# Altium PCB Carrier_I_PCB.PcbDoc
Units mm, origin at the board's own origin, x right, y up, seen from the top; angles counter-clockwise.
Board outline 100 x 80 mm, 2 copper layers (Top Layer, Bottom Layer); 8 components, 112 nets, 224 pads, 112 vias.
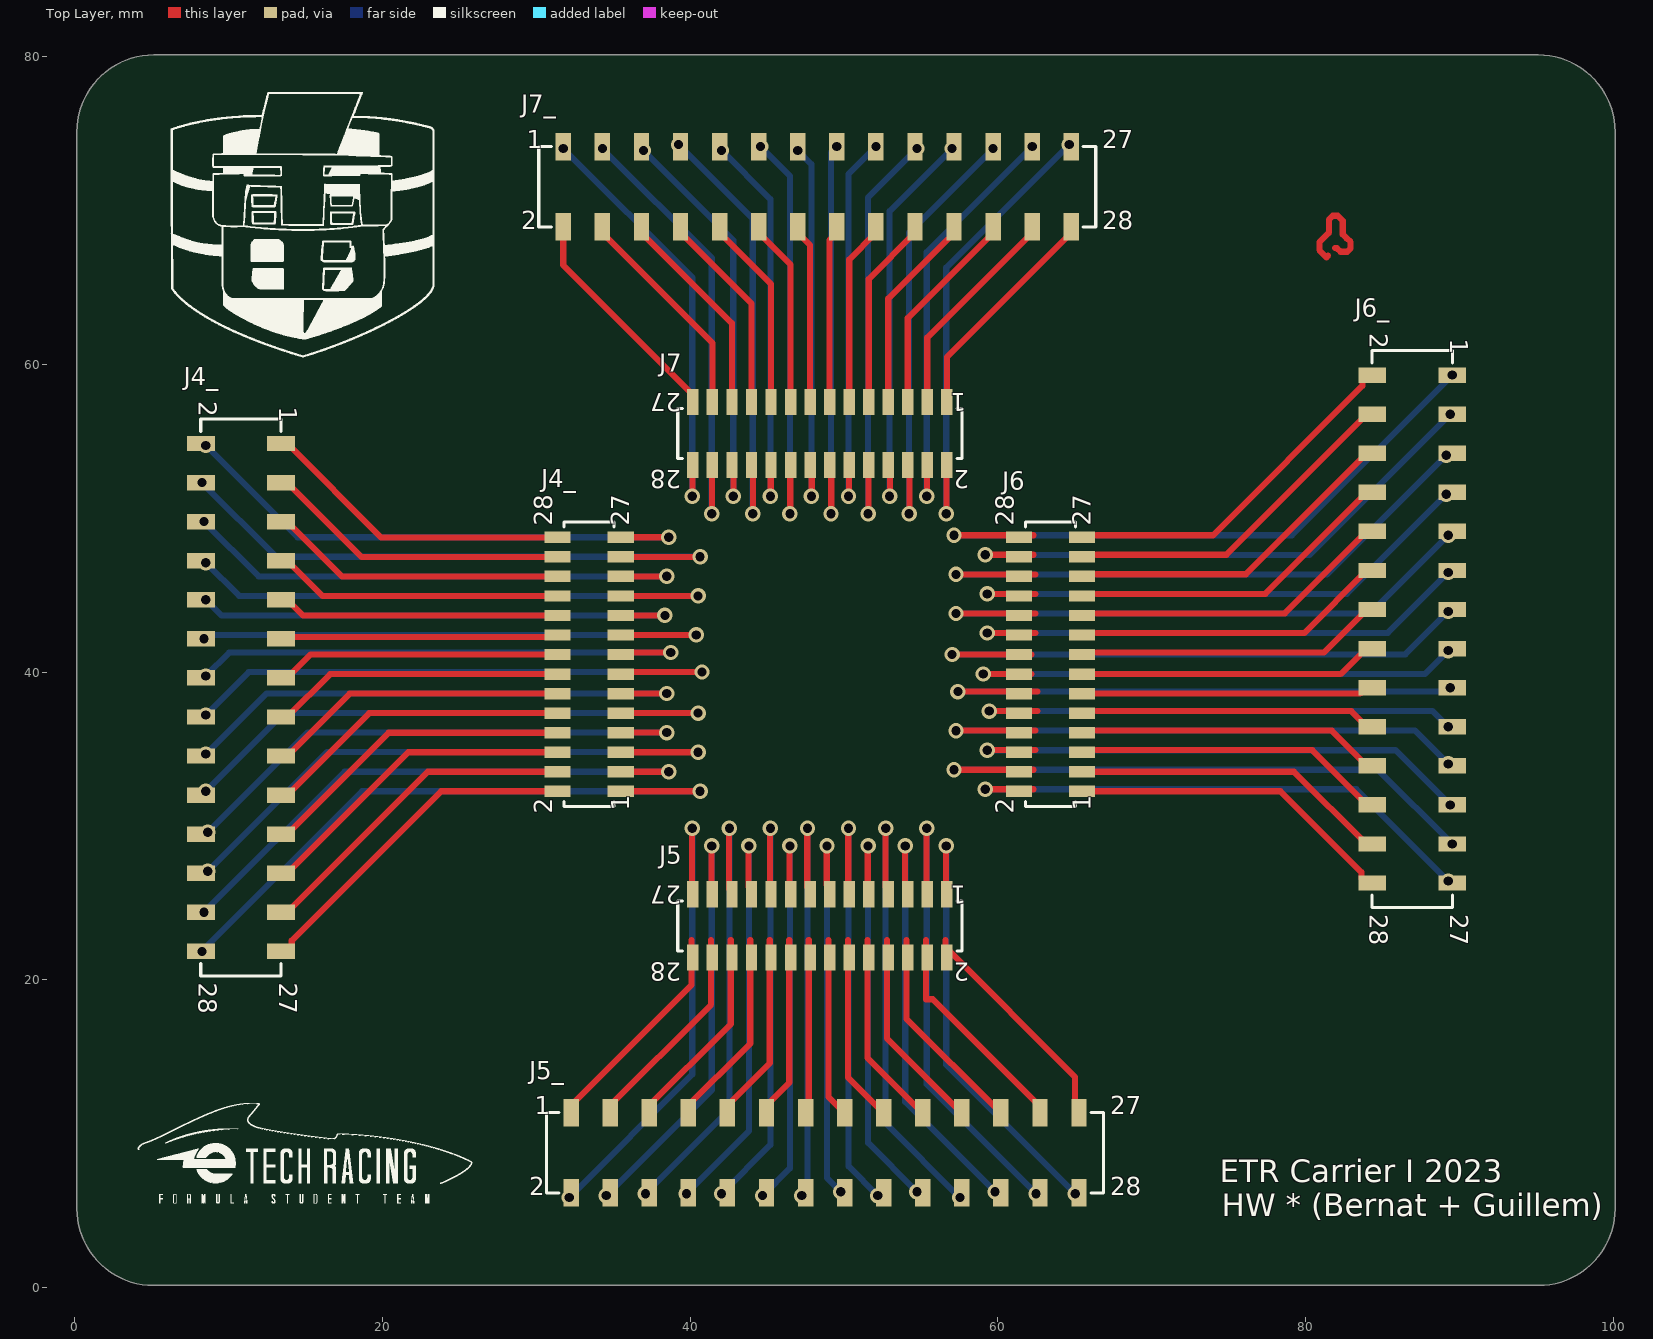
[diagram p0: Top Layer view]
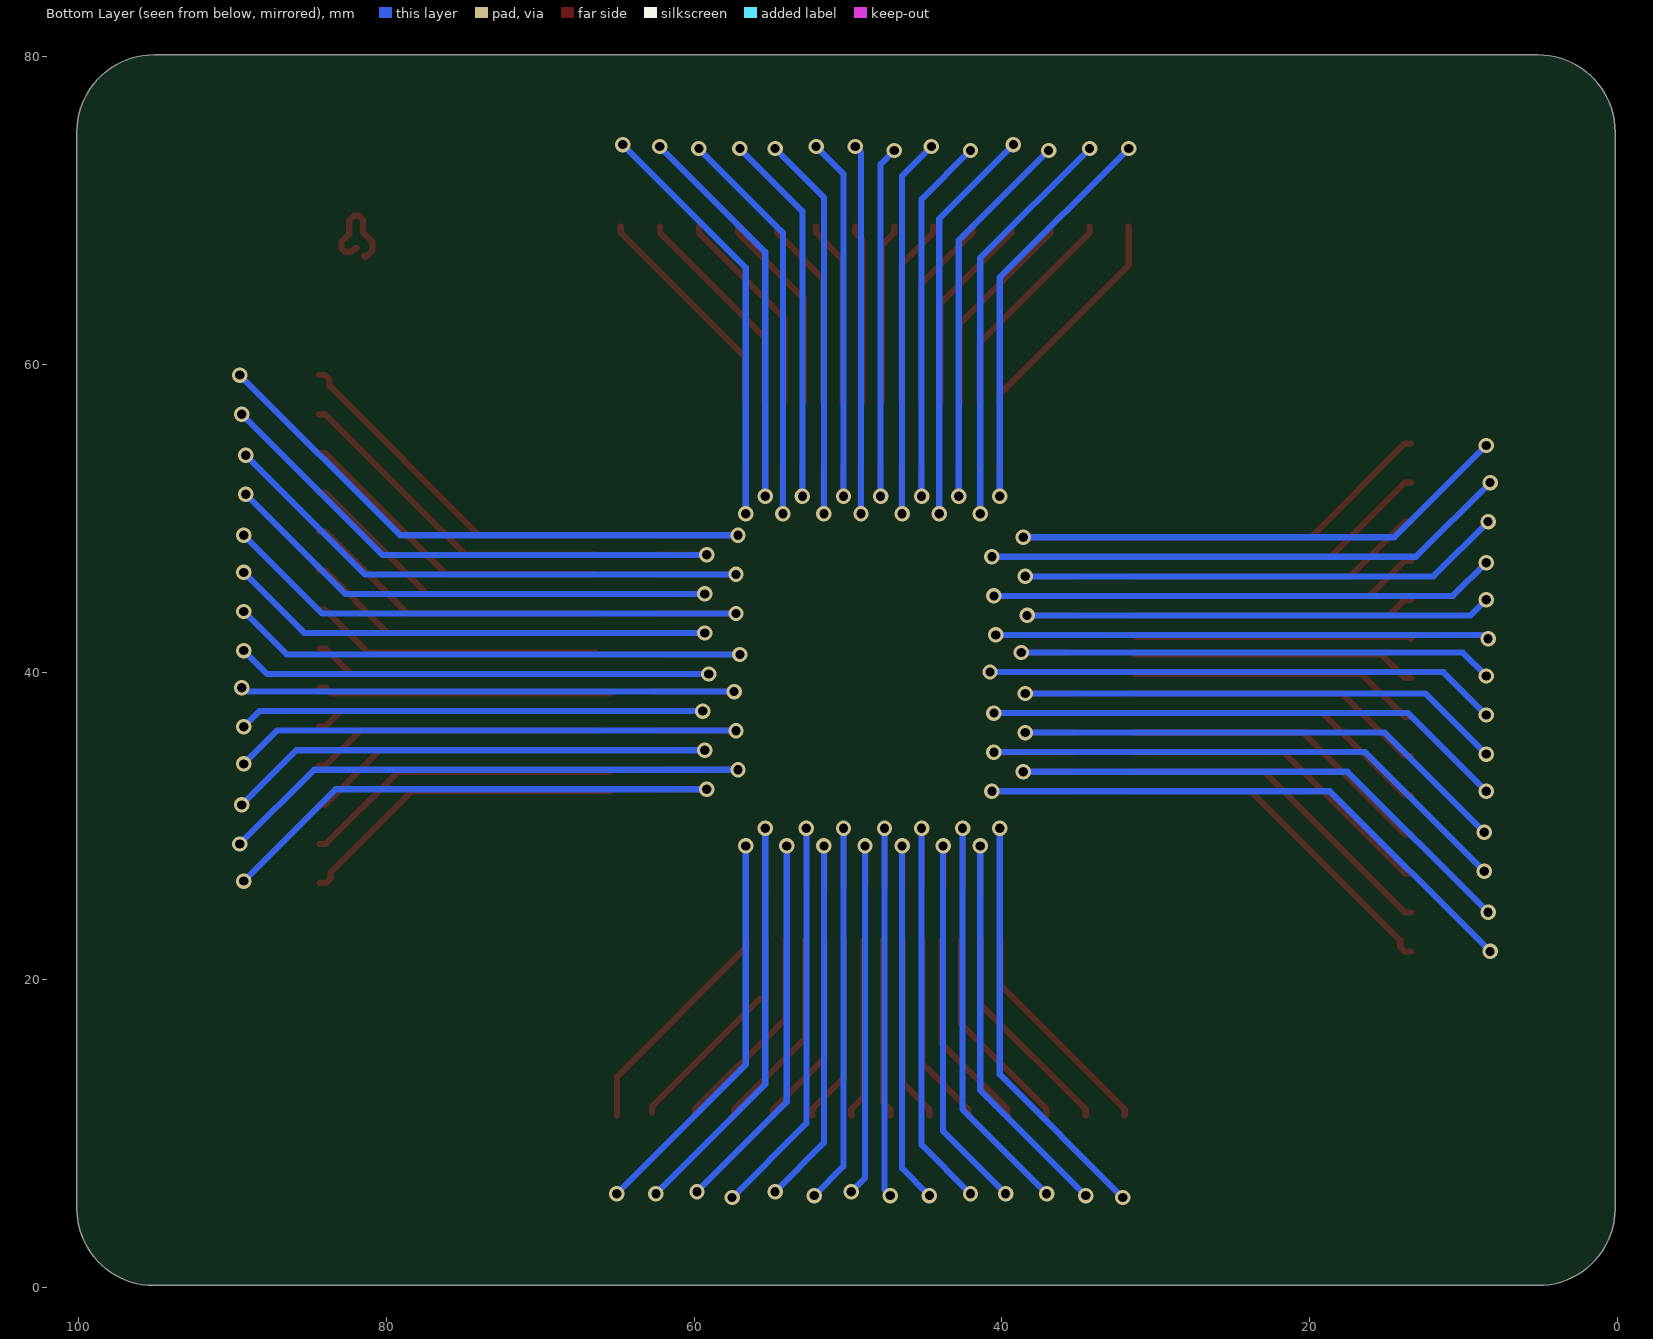
[diagram p1: Bottom Layer view, seen from below]
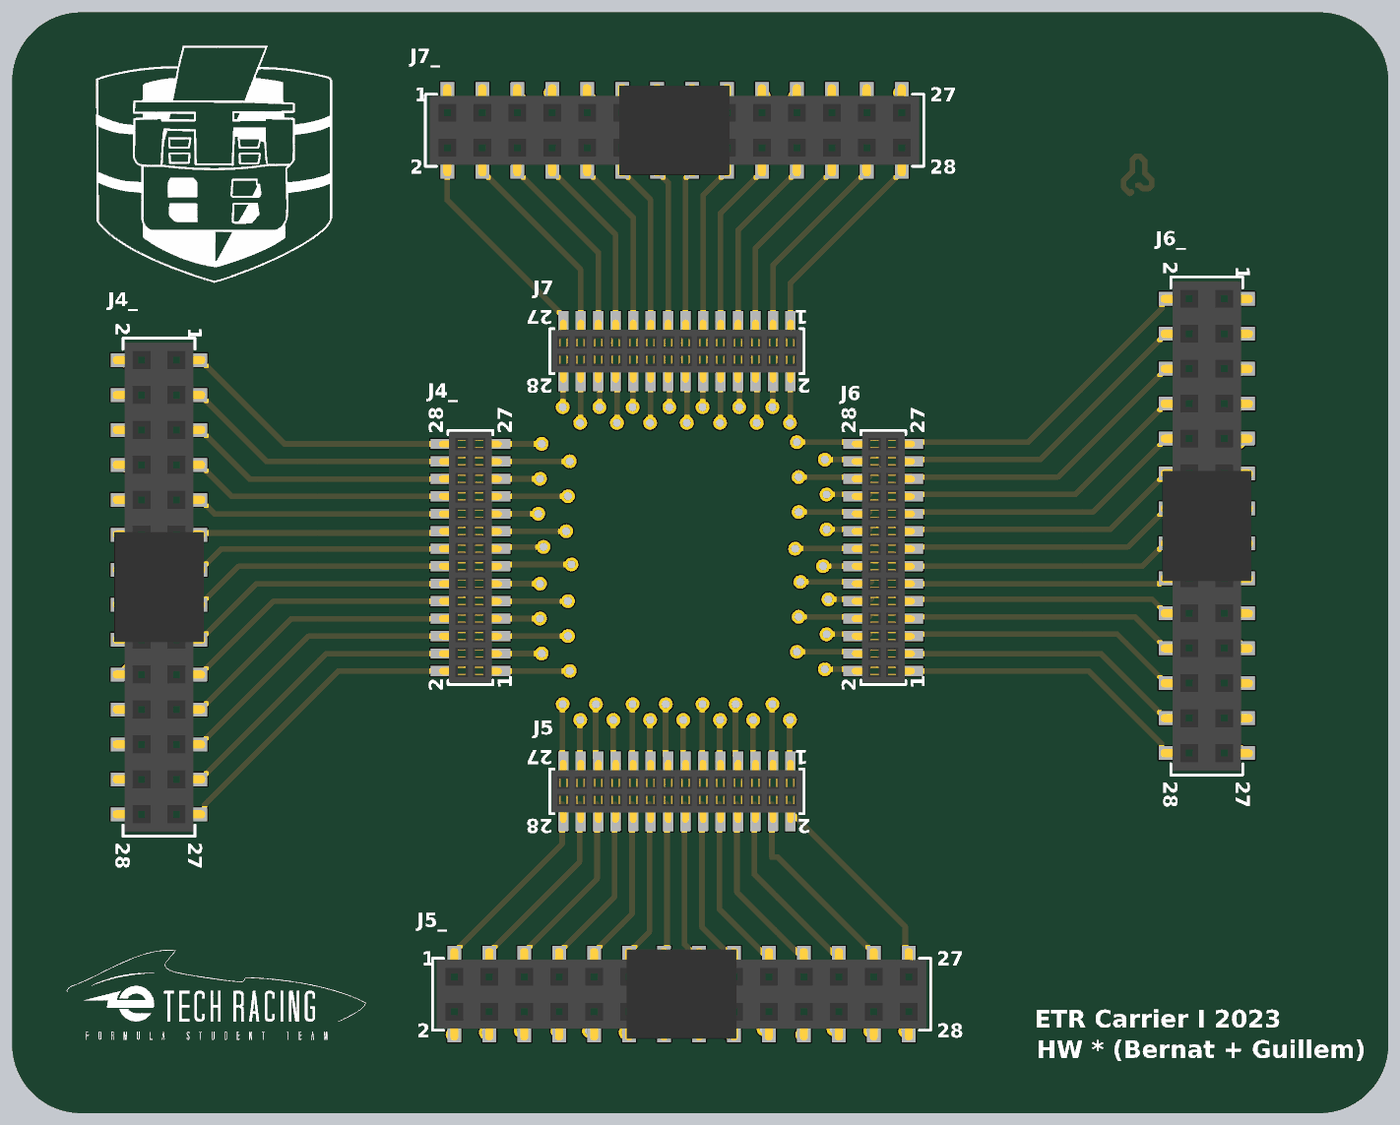
[diagram p2: 3D render of the assembled board from above, using the file's embedded part models]

## Layer stack, top to bottom
Top Solder: solder mask 0.0102, Solder Resist, Dk 3.5
Top Layer: signal copper 0.0356
Dielectric 1: dielectric 0.32, FR-4, Dk 4.8
Bottom Layer: signal copper 0.0356
Bottom Solder: solder mask 0.0102, Solder Resist, Dk 3.5

## Board outline
5.127,0.127 cw(c5.127,5.127) 0.127,5.127 0.127,75.127 cw(c5.127,75.127) 5.127,80.127 95.127,80.127 cw(c95.127,75.127) 100.127,75.127 100.127,5.127 cw(c95.127,5.127) 95.127,0.127

## Design rules (kind name [scope] priority, off if disabled: settings)
Clearance [All] p1: gap=0.254 ignorepadtopadclearanceinfootprint=FALSE except(0: Arc-Hole Track-Hole SMDPad-Hole THPad-Hole Via-Hole Fill-Hole Poly-Hole Region-Hole Text-Hole)
PolygonConnect [All] p1: connectstyle=Relief reliefconductorwidth=0.254 reliefentries=4 polygonreliefangle="90 Angle" airgapwidth=0.254
RoutingVias [All] p1: holewidth=0.6 width=1 viastyle="Through Hole" minholewidth=0.6 minwidth=1 maxholewidth=0.6 maxwidth=1
SolderMaskExpansion [All] p1: expansion=0.102 istentingtop=FALSE
Width [All] p1: maxlimit=1 minlimit=0.254 preferedwidth=0.4 minimp=50.000000 maximp=50.000000 favimp=50.000000
30 further rules are at their usual default settings.

## Components (designator, comment, footprint, x,y, rotation, side; value= is the part's Value field where it differs from the comment)
J4_ "62332821021" 62302821021 33.429,40.508 r90 top
J4_ "61002821821" 61002821821 10.795,38.354 r270 top
J5 "62332821021" 62302821021 48.429,23.508 r180 top
J5_ "61002821821" 61002821821 48.768,8.763 r0 top
J6 "62332821021" 62302821021 63.429,40.508 r90 top
J6_ "61002821821" 61002821821 86.935,42.799 r270 top
J7 "62332821021" 62302821021 48.429,55.508 r180 top
J7_ "61002821821" 61002821821 48.26,71.561 r0 top

## Footprints (in the part's own frame and the unit in brackets; to place one, negate y for a bottom-side part, rotate by r counter-clockwise, add the part's x,y. Pads: shape width x height; smd on the part's side, far side on the other; paste and mask are expansions set on the pad)
61002821821 [mm] "Socket Header, Pitch 2.54 mm, SMT, Vertical, dual row, 28p"
  rect 1x1.8 smd: 1(-16.51,2.6) 2(-16.51,-2.6) 3(-13.97,2.6) 4(-13.97,-2.6) 5(-11.43,2.6) 6(-11.43,-2.6) 7(-8.89,2.6) 8(-8.89,-2.6) 9(-6.35,2.6) 10(-6.35,-2.6) 11(-3.81,2.6) 12(-3.81,-2.6) 13(-1.27,2.6) 14(-1.27,-2.6) 15(1.27,2.6) 16(1.27,-2.6) 17(3.81,2.6) 18(3.81,-2.6) 19(6.35,2.6) 20(6.35,-2.6) 21(8.89,2.6) 22(8.89,-2.6) 23(11.43,2.6) 24(11.43,-2.6) 25(13.97,2.6) 26(13.97,-2.6) 27(16.51,2.6) 28(16.51,-2.6)
  silkscreen extent -18.11,-2.62 18.11,2.62, body extent -17.78,-3.35 17.78,3.35, height 8.5
62302821021 [mm] "Socket Header, Pitch 1.27 mm, SMT, Vertical, dual row, 28p"
  rect 0.74x1.7 smd: 1(-8.255,-2.05) 2(-8.255,2.05) 3(-6.985,-2.05) 4(-6.985,2.05) 5(-5.715,-2.05) 6(-5.715,2.05) 7(-4.445,-2.05) 8(-4.445,2.05) 9(-3.175,-2.05) 10(-3.175,2.05) 11(-1.905,-2.05) 12(-1.905,2.05) 13(-0.635,-2.05) 14(-0.635,2.05) 15(0.635,-2.05) 16(0.635,2.05) 17(1.905,-2.05) 18(1.905,2.05) 19(3.175,-2.05) 20(3.175,2.05) 21(4.445,-2.05) 22(4.445,2.05) 23(5.715,-2.05) 24(5.715,2.05) 25(6.985,-2.05) 26(6.985,2.05) 27(8.255,-2.05) 28(8.255,2.05)
  silkscreen extent -9.24,-1.62 9.24,1.63, body extent -9.09,-2.3 9.09,2.3, height 4.6

## Part data
J4_ J5 J6 J7: "WR-PHD Socket Header, SMT, Vertical, pitch 1.27mm, 2 Row, 28P", Contact Resistance=20mΩ, Manufacturer="Wurth Elektronik", Operating Temperature Max=105°C, Operating Temperature Min=-40°C, Rated Current=1A, Withstanding Voltage=500V, Working Voltage=250V, Category="Board-to-Board Connectors", ComponentLink1Description="Website Link", ComponentLink1URL=https://www.we-online.com/redexpert/article/62332821021?ad, ComponentLink2Description="Datasheet Link", ComponentLink2URL=https://www.we-online.com/redexpert/spec/62332821021?ad, Gender="Socket Header", Manufacturer Part Number=62332821021, Match Code=WR-PHD, Mount="Surface Mount", Number of Pins=28, Number of Rows=2, Orientation=Vertical, Packaging="Tape and Reel", Pitch=1.27mm
J4_ J5_ J6_ J7_: "WR-PHD Socket Header, SMT, Vertical, pitch 2.54mm, 2 Row, 28P", Contact Resistance=20mΩ, Manufacturer="Wurth Elektronik", Operating Temperature Max=105°C, Operating Temperature Min=-40°C, Rated Current=3A, Withstanding Voltage=600V, Working Voltage=250V, Category="Board-to-Board Connectors", ComponentLink1Description="Website Link", ComponentLink1URL=https://www.we-online.com/redexpert/article/61002821821?ad, ComponentLink2Description="Datasheet Link", ComponentLink2URL=https://www.we-online.com/redexpert/spec/61002821821?ad, Gender="Socket Header", Manufacturer Part Number=61002821821, Match Code=WR-PHD, Mount="Surface Mount", Number of Pins=28, Number of Rows=2, Orientation=Vertical, Packaging=Tube, Pitch=2.54mm

## Via types
v1: diameter 1, hole 0.6, Top Layer to Bottom Layer, 112 vias

## Nets (pads, with @x,y where several pads share a name; then routed paths per layer and width w, separated by ;. In a path a pad name is that pad's centre, name@x,y a point inside that pad or via, vN(x,y) a via of type N, cw(c..) or ccw(c..) an arc to the next point about the centre after c; other vN are vias at no path point)
P41: J4_.1@35.479,32.253 J4_.28@8.195,21.844 | length 41.9
  Top Layer w0.4: J4_.1@35.481,32.255 40.637,32.255 v1(40.64,32.258)
  Bottom Layer w0.4: v1(8.255,21.844) 18.669,32.258 v1(40.64,32.258)
P42: J4_.3@35.479,33.523 J4_.26@8.195,24.384 | length 37.1
  Top Layer w0.4: J4_.3@35.481,33.525 38.605,33.525 v1(38.608,33.528)
  Bottom Layer w0.4: v1(8.382,24.384) 17.526,33.528 v1(38.608,33.528)
P43: J4_.5@35.479,34.793 J4_.24@8.195,26.924 | length 40.2
  Top Layer w0.4: J4_.5@35.354,34.795 40.51,34.795 v1(40.513,34.798)
  Bottom Layer w0.4: v1(8.636,27.051) 16.383,34.798 v1(40.513,34.798)
P44: J4_.7@35.479,36.063 J4_.22@8.195,29.464 | length 35.7
  Top Layer w0.4: J4_.7@35.354,36.065 38.478,36.065 v1(38.481,36.068)
  Bottom Layer w0.4: v1(8.636,29.591) 15.113,36.068 v1(38.481,36.068)
P45: J4_.9@35.479,37.333 J4_.20@8.195,32.004 | length 39.3
  Top Layer w0.4: J4_.9@35.354,37.335 40.51,37.335 v1(40.513,37.338)
  Bottom Layer w0.4: v1(8.509,32.258) 13.589,37.338 v1(40.513,37.338)
P46: J4_.11@35.479,38.603 J4_.18@8.195,34.544 | length 34.7
  Top Layer w0.4: J4_.11@35.354,38.605 38.478,38.605 v1(38.481,38.608)
  Bottom Layer w0.4: v1(8.509,34.671) 12.446,38.608 v1(38.481,38.608)
P47: J4_.13@35.479,39.873 J4_.16@8.195,37.084 | length 38.6
  Top Layer w0.4: J4_.13@35.608,40.002 40.764,40.002 v1(40.767,40.005)
  Bottom Layer w0.4: v1(8.509,37.211) 11.303,40.005 v1(40.767,40.005)
P48: J4_.14@8.195,39.624 J4_.15@35.479,41.143 | length 34
  Top Layer w0.4: J4_.15@35.608,41.272 38.732,41.272 v1(38.735,41.275)
  Bottom Layer w0.4: v1(8.509,39.751) 10.033,41.275 v1(38.735,41.275)
P49: J4_.12@8.195,42.164 J4_.17@35.479,42.413 | length 37.3
  Top Layer w0.4: J4_.17@35.227,42.415 40.383,42.415 v1(40.386,42.418)
  Bottom Layer w0.4: v1(8.382,42.164) 8.544,42.164 8.798,42.418 v1(40.386,42.418)
P51: J5.1 J5_.28 | length 29
  Top Layer w0.4: J5.1@56.621,25.781 56.621,28.681 v1(56.642,28.702)
  Bottom Layer w0.4: v1(56.642,28.702) 56.642,14.478 v1(65.024,6.096)
P52: J5.3 J5_.26 | length 30.8
  Top Layer w0.4: J5.3@55.351,25.781 55.351,29.824 v1(55.372,29.845)
  Bottom Layer w0.4: v1(55.372,29.845) 55.372,13.208 v1(62.484,6.096)
P53: J5.5 J5_.24 | length 27.8
  Top Layer w0.4: J5.5@53.954,25.781 53.954,28.681 v1(53.975,28.702)
  Bottom Layer w0.4: v1(53.975,28.702) 53.975,12.065 v1(59.817,6.223)
P54: J5.7 J5_.22 | length 29.8
  Top Layer w0.4: J5.7@52.684,26.035 52.684,29.824 v1(52.705,29.845)
  Bottom Layer w0.4: v1(52.705,29.845) 52.705,10.668 v1(57.531,5.842)
P55: J5.9 J5_.20 | length 26.6
  Top Layer w0.4: J5.9@51.541,25.908 51.541,28.681 v1(51.562,28.702)
  Bottom Layer w0.4: v1(51.562,28.702) 51.562,9.398 v1(54.737,6.223)
P56: J5.11 J5_.18 | length 28.4
  Top Layer w0.4: J5.11@50.271,26.162 50.271,29.824 v1(50.292,29.845)
  Bottom Layer w0.4: v1(50.292,29.845) 50.292,7.874 v1(52.197,5.969)
P57: J5.13 J5_.16 | length 25.4
  Top Layer w0.4: J5.13@48.874,26.162 48.874,28.681 v1(48.895,28.702)
  Bottom Layer w0.4: v1(48.895,28.702) 48.895,7.112 v1(49.784,6.223)
P58: J5.15 J5_.14 | length 27.9
  Top Layer w0.4: J5.15@47.604,26.035 47.604,29.824 v1(47.625,29.845)
  Bottom Layer w0.4: v1(47.244,5.969) 47.625,6.35 v1(47.625,29.845)
P59: J5.17 J5_.12 | length 26.1
  Top Layer w0.4: J5.17@46.461,26.035 46.461,28.681 v1(46.482,28.702)
  Bottom Layer w0.4: v1(44.704,5.969) 46.482,7.747 v1(46.482,28.702)
P61: J6.1 J6_.28 | length 21.6
  Top Layer w0.4: J6.1 78.371,32.253 83.635,26.989 83.635,26.589 83.935,26.289 J6_.28
P62: J6.3 J6_.26 | length 20.8
  Top Layer w0.4: J6.3 79.241,33.523 83.935,28.829 J6_.26
P63: J6.5 J6_.24 | length 19.5
  Top Layer w0.4: 66.411,34.93 80.434,34.93 83.995,31.369 J6_.24@84.395,31.369
P64: J6.7 J6_.22 | length 18.9
  Top Layer w0.4: 66.411,36.2 81.704,36.2 83.995,33.909 J6_.22@84.395,33.909
P65: J6.9 J6_.20 | length 18.4
  Top Layer w0.4: 66.411,37.47 82.974,37.47 83.995,36.449 J6_.20@84.395,36.449
P66: J6.11 J6_.18 | length 19
  Top Layer w0.4: J6.11 83.549,38.603 83.935,38.989 J6_.18
P67: J6.13 J6_.16 | length 19.5
  Top Layer w0.4: J6.13 82.279,39.873 83.935,41.529 J6_.16
P68: J6.15 J6_.14 | length 19.1
  Top Layer w0.4: 66.411,41.28 81.206,41.28 83.995,44.069 J6_.14@84.395,44.069
P69: J6.17 J6_.12 | length 19.7
  Top Layer w0.4: 66.411,42.55 79.936,42.55 83.995,46.609 J6_.12@84.395,46.609
P71: J7.1 J7_.28 | length 14.8
  Top Layer w0.4: J7.1 56.684,60.475 64.77,68.561 J7_.28
P72: J7.3 J7_.26 | length 14.2
  Top Layer w0.4: J7.3 55.414,61.745 62.23,68.561 J7_.26
P73: J7.5 J7_.24 | length 13.7
  Top Layer w0.4: J7.5 54.144,63.015 59.69,68.561 J7_.24
P74: J7.7 J7_.22 | length 13.2
  Top Layer w0.4: J7.7 52.874,64.285 57.15,68.561 J7_.22
P75: J7.9 J7_.20 | length 12.6
  Top Layer w0.4: J7.9 51.604,65.555 54.61,68.561 J7_.20
P76: J7.11 J7_.18 | length 12.1
  Top Layer w0.4: J7.11 50.334,66.825 52.07,68.561 J7_.18
P77: J7.13 J7_.16 | length 11.6
  Top Layer w0.4: J7.13 49.064,68.095 49.53,68.561 J7_.16
P78: J7.15 J7_.14 | length 11.7
  Top Layer w0.4: J7_.14 46.99,68.561 47.794,67.757 J7.15
P79: J7.17 J7_.12 | length 12.3
  Top Layer w0.4: J7_.12 44.45,68.561 46.524,66.487 J7.17
P410: J4_.10@8.195,44.704 J4_.19@35.479,43.683 | length 33.4
  Top Layer w0.4: J4_.19@35.227,43.685 38.351,43.685 v1(38.354,43.688)
  Bottom Layer w0.4: v1(8.509,44.704) 9.525,43.688 v1(38.354,43.688)
P411: J4_.8@8.195,47.244 J4_.21@35.479,44.953 | length 38.1
  Top Layer w0.4: J4_.21@35.354,44.955 40.51,44.955 v1(40.513,44.958)
  Bottom Layer w0.4: v1(8.509,47.117) 10.668,44.958 v1(40.513,44.958)
P412: J4_.6@8.195,49.784 J4_.23@35.479,46.223 | length 34.7
  Top Layer w0.4: J4_.23@35.354,46.225 38.478,46.225 v1(38.481,46.228)
  Bottom Layer w0.4: v1(8.382,49.784) 11.938,46.228 v1(38.481,46.228)
P413: J4_.4@8.195,52.324 J4_.25@35.479,47.493 | length 39.5
  Top Layer w0.4: J4_.25@35.479,47.493 35.481,47.495 40.637,47.495 v1(40.64,47.498)
  Bottom Layer w0.4: v1(8.255,52.324) 13.081,47.498 v1(40.64,47.498)
P414: J4_.2@8.195,54.864 J4_.27@35.479,48.763 | length 35.9
  Top Layer w0.4: J4_.27@35.479,48.763 35.481,48.765 38.605,48.765 v1(38.608,48.768)
  Bottom Layer w0.4: v1@8.382,54.61 v1(8.509,54.737) 14.478,48.768 v1(38.608,48.768)
P415: J4_.2@31.379,32.253 J4_.27@13.395,21.844 | length 22.5
  Top Layer w0.4: J4_.27@13.395,21.844 13.795,21.844 14.095,22.144 14.095,22.544 23.804,32.253 J4_.2@31.379,32.253
P416: J4_.4@31.379,33.523 J4_.25@13.395,24.384 | length 21.8
  Top Layer w0.4: J4_.25@13.395,24.384 13.795,24.384 22.934,33.523 J4_.4@31.379,33.523
P417: J4_.6@31.379,34.793 J4_.23@13.395,26.924 | length 21.2
  Top Layer w0.4: J4_.23@13.395,26.924 13.795,26.924 21.664,34.793 J4_.6@31.379,34.793
P418: J4_.8@31.379,36.063 J4_.21@13.395,29.464 | length 20.7
  Top Layer w0.4: J4_.21@13.395,29.464 13.795,29.464 20.394,36.063 J4_.8@31.379,36.063
P419: J4_.10@31.379,37.333 J4_.19@13.395,32.004 | length 20.2
  Top Layer w0.4: J4_.19@13.395,32.004 13.795,32.004 19.124,37.333 J4_.10@31.379,37.333
P420: J4_.12@31.379,38.603 J4_.17@13.395,34.544 | length 19.7
  Top Layer w0.4: J4_.17@13.395,34.544 13.795,34.544 17.854,38.603 J4_.12@31.379,38.603
P421: J4_.14@31.379,39.873 J4_.15@13.395,37.084 | length 19.1
  Top Layer w0.4: J4_.15@13.395,37.084 13.795,37.084 16.584,39.873 J4_.14@31.379,39.873
P422: J4_.13@13.395,39.624 J4_.16@31.379,41.143 | length 18.6
  Top Layer w0.4: J4_.13@13.395,39.624 13.795,39.624 15.314,41.143 J4_.16@31.379,41.143
P423: J4_.11@13.395,42.164 J4_.18@31.379,42.413 | length 18.1
  Top Layer w0.4: J4_.11@13.395,42.164 13.519,42.288 31.254,42.288 J4_.18@31.379,42.413
P424: J4_.9@13.395,44.704 J4_.20@31.379,43.683 | length 18.4
  Top Layer w0.4: J4_.9@13.395,44.704 13.795,44.704 14.816,43.683 J4_.20@31.379,43.683
P425: J4_.7@13.395,47.244 J4_.22@31.379,44.953 | length 18.9
  Top Layer w0.4: J4_.7@13.395,47.244 13.795,47.244 16.086,44.953 J4_.22@31.379,44.953
P426: J4_.5@13.395,49.784 J4_.24@31.379,46.223 | length 19.5
  Top Layer w0.4: J4_.5@13.395,49.784 13.795,49.784 17.356,46.223 J4_.24@31.379,46.223
P427: J4_.3@13.395,52.324 J4_.26@31.379,47.493 | length 20
  Top Layer w0.4: J4_.3@13.395,52.324 13.795,52.324 18.626,47.493 J4_.26@31.379,47.493
P428: J4_.1@13.395,54.864 J4_.28@31.379,48.763 | length 20.5
  Top Layer w0.4: J4_.1@13.395,54.864 13.795,54.864 19.896,48.763 J4_.28@31.379,48.763
P510: J5.19 J5_.10 | length 28.8
  Top Layer w0.4: J5.19@45.191,26.162 45.191,29.824 v1(45.212,29.845)
  Bottom Layer w0.4: v1(42.037,6.096) 45.212,9.271 v1(45.212,29.845)
P511: J5.21 J5_.8 | length 27
  Top Layer w0.4: J5.21@43.794,26.035 43.794,28.681 v1(43.815,28.702)
  Bottom Layer w0.4: v1(39.751,6.096) 43.815,10.16 v1(43.815,28.702)
P512: J5.23 J5_.6 | length 30
  Top Layer w0.4: J5.23@42.524,25.908 42.524,29.824 v1(42.545,29.845)
  Bottom Layer w0.4: v1(37.084,6.096) 42.545,11.557 v1(42.545,29.845)
P513: J5.25 J5_.4 | length 28.7
  Top Layer w0.4: J5.25@41.381,25.558 41.381,28.681 v1(41.402,28.702)
  Bottom Layer w0.4: v1(34.544,5.969) 41.402,12.827 v1(41.402,28.702)
P514: J5.27 J5_.2 | length 31.4
  Top Layer w0.4: J5.27@40.111,25.781 40.111,29.824 v1(40.132,29.845)
  Bottom Layer w0.4: v1(32.131,5.842) 40.132,13.843 v1(40.132,29.845)
P515: J5.2 J5_.27 | length 14.9
  Top Layer w0.4: 56.6,22.579 56.6,22.099 65.024,13.675 J5_.27@65.024,11.176
P516: J5.4 J5_.25 | length 14.5
  Top Layer w0.4: 55.33,22.579 55.33,18.73 55.771,18.73 62.738,11.763 J5_.25
P517: J5.6 J5_.23 | length 13.8
  Top Layer w0.4: 54.06,22.579 54.06,17.46 59.944,11.576 J5_.23@59.944,11.176
P518: J5.8 J5_.21 | length 13.3
  Top Layer w0.4: 52.79,22.579 52.79,16.19 57.404,11.576 J5_.21@57.404,11.176
P519: J5.10 J5_.19 | length 12.8
  Top Layer w0.4: 51.52,22.579 51.52,14.92 54.864,11.576 J5_.19@54.864,11.176
P520: J5.12 J5_.17 | length 12.3
  Top Layer w0.4: 50.25,22.579 50.25,13.65 52.324,11.576 J5_.17@52.324,11.176
P521: J5.14 J5_.15 | length 11.7
  Top Layer w0.4: 48.98,22.579 48.98,12.38 49.784,11.576 J5_.15@49.784,11.176
P522: J5.16 J5_.13 | length 11.6
  Top Layer w0.4: J5_.13@47.244,11.176 47.244,11.576 47.71,12.042 47.71,22.579
P523: J5.18 J5_.11 | length 12.1
  Top Layer w0.4: J5_.11@44.704,11.176 44.704,11.576 46.44,13.312 46.44,22.579
P524: J5.20 J5_.9 | length 12.6
  Top Layer w0.4: J5_.9@42.164,11.176 42.164,11.576 45.17,14.582 45.17,22.579
P525: J5.22 J5_.7 | length 13.2
  Top Layer w0.4: J5_.7@39.624,11.176 39.624,11.576 43.9,15.852 43.9,22.579
P526: J5.24 J5_.5 | length 13.7
  Top Layer w0.4: J5_.5@37.084,11.176 37.084,11.576 42.63,17.122 42.63,22.579
P527: J5.26 J5_.3 | length 14.2
  Top Layer w0.4: J5_.3@34.544,11.176 34.544,11.576 41.36,18.392 41.36,22.579
P528: J5.28 J5_.1 | length 14.8
  Top Layer w0.4: J5_.1@32.004,11.176 32.004,11.576 40.09,19.662 40.09,22.579
P610: J6.19 J6_.10 | length 20.2
  Top Layer w0.4: 66.411,43.82 78.666,43.82 83.995,49.149 J6_.10@84.395,49.149
P611: J6.21 J6_.8 | length 20.7
  Top Layer w0.4: 66.411,45.09 77.396,45.09 83.995,51.689 J6_.8@84.395,51.689
P612: J6.23 J6_.6 | length 21.2
  Top Layer w0.4: 66.411,46.36 76.126,46.36 83.995,54.229 J6_.6@84.395,54.229
P613: J6.25 J6_.4 | length 21.8
  Top Layer w0.4: 66.411,47.63 74.856,47.63 83.995,56.769 J6_.4@84.395,56.769
P614: J6.27 J6_.2 | length 22.5
  Top Layer w0.4: 66.411,48.9 73.986,48.9 83.695,58.609 83.695,59.009 83.995,59.309 J6_.2@84.395,59.309
P615: J6.2 J6_.27 | length 35.9
  Top Layer w0.4: v1(59.182,32.385) 59.185,32.388 62.309,32.388 62.311,32.39
  Bottom Layer w0.4: v1(59.182,32.385) 83.312,32.385 v1(89.281,26.416) v1@89.408,26.543
P616: J6.4 J6_.25 | length 39.5
  Top Layer w0.4: v1(57.15,33.655) 57.153,33.658 62.309,33.658 62.311,33.66
  Bottom Layer w0.4: v1(57.15,33.655) 84.709,33.655 v1(89.535,28.829)
P617: J6.6 J6_.23 | length 34.7
  Top Layer w0.4: v1(59.309,34.925) 59.312,34.928 62.436,34.928
  Bottom Layer w0.4: v1(59.309,34.925) 85.852,34.925 v1(89.408,31.369)
P618: J6.8 J6_.21 | length 38.1
  Top Layer w0.4: v1(57.277,36.195) 57.28,36.198 62.436,36.198
  Bottom Layer w0.4: v1(57.277,36.195) 87.122,36.195 v1(89.281,34.036)
P619: J6.10 J6_.19 | length 33.4
  Top Layer w0.4: v1(59.436,37.465) 59.439,37.468 62.563,37.468
  Bottom Layer w0.4: v1(59.436,37.465) 88.265,37.465 v1(89.281,36.449)
P620: J6.12 J6_.17 | length 37.3
  Top Layer w0.4: v1(57.404,38.735) 57.407,38.738 62.563,38.738
  Bottom Layer w0.4: v1(57.404,38.735) 88.992,38.735 89.246,38.989 v1(89.408,38.989)
P621: J6.14 J6_.15 | length 34
  Top Layer w0.4: v1(59.055,39.878) 59.058,39.881 J6.14@62.182,39.881
  Bottom Layer w0.4: v1(59.055,39.878) 87.757,39.878 v1(89.281,41.402)
P622: J6.16 J6_.13 | length 38.6
  Top Layer w0.4: v1(57.023,41.148) 57.026,41.151 J6.16@62.182,41.151
  Bottom Layer w0.4: v1(57.023,41.148) 86.487,41.148 v1(89.281,43.942)
P623: J6.18 J6_.11 | length 34.7
  Top Layer w0.4: v1(59.309,42.545) 59.312,42.548 62.436,42.548
  Bottom Layer w0.4: v1(59.309,42.545) 85.344,42.545 v1(89.281,46.482)
P624: J6.20 J6_.9 | length 39.3
  Top Layer w0.4: v1(57.277,43.815) 57.28,43.818 62.436,43.818
  Bottom Layer w0.4: v1(57.277,43.815) 84.201,43.815 v1(89.281,48.895)
P625: J6.22 J6_.7 | length 35.7
  Top Layer w0.4: v1(59.309,45.085) 59.312,45.088 62.436,45.088
  Bottom Layer w0.4: v1(59.309,45.085) 82.677,45.085 v1(89.154,51.562)
P626: J6.24 J6_.5 | length 40.2
  Top Layer w0.4: v1(57.277,46.355) 57.28,46.358 62.436,46.358
  Bottom Layer w0.4: v1(57.277,46.355) 81.407,46.355 v1(89.154,54.102)
P627: J6.26 J6_.3 | length 37.1
  Top Layer w0.4: v1(59.182,47.625) 59.185,47.628 62.309,47.628
  Bottom Layer w0.4: v1(59.182,47.625) 80.264,47.625 v1(89.408,56.769)
P628: J6.28 J6_.1 | length 41.9
  Top Layer w0.4: v1(57.15,48.895) 57.153,48.898 62.309,48.898
  Bottom Layer w0.4: v1(57.15,48.895) 79.121,48.895 v1(89.535,59.309)
P710: J7.19 J7_.10 | length 12.8
  Top Layer w0.4: J7_.10 41.91,68.561 45.254,65.217 J7.19
P711: J7.21 J7_.8 | length 13.3
  Top Layer w0.4: J7_.8 39.37,68.561 43.984,63.947 J7.21
P712: J7.23 J7_.6 | length 13.8
  Top Layer w0.4: J7_.6 36.83,68.561 42.714,62.677 J7.23
P713: J7.25 J7_.4 | length 14.4
  Top Layer w0.4: J7_.4 34.29,68.561 41.444,61.407 J7.25
P714: J7.27 J7_.2 | length 14.9
  Top Layer w0.4: J7_.2 31.75,66.462 40.174,58.038 J7.27
P715: J7.2 J7_.27 | length 30.5
  Top Layer w0.4: v1(56.642,50.292) 56.663,50.313 J7.2@56.663,53.437
  Bottom Layer w0.4: v1(56.642,50.292) 56.642,66.294 v1(64.643,74.295)
P716: J7.4 J7_.25 | length 27.6
  Top Layer w0.4: v1(55.372,51.435) 55.393,51.456 J7.4@55.393,53.437
  Bottom Layer w0.4: v1(55.372,51.435) 55.372,67.31 v1(62.23,74.168)
P717: J7.6 J7_.23 | length 29.2
  Top Layer w0.4: v1(54.229,50.292) 54.25,50.313 J7.6@54.25,53.437
  Bottom Layer w0.4: v1(54.229,50.292) 54.229,68.58 v1(59.69,74.041)
P718: J7.8 J7_.21 | length 26.3
  Top Layer w0.4: v1(52.959,51.435) 52.98,51.456 J7.8@52.98,53.437
  Bottom Layer w0.4: v1(52.959,51.435) 52.959,69.977 v1(57.023,74.041)
P719: J7.10 J7_.19 | length 28.2
  Top Layer w0.4: v1(51.562,50.292) 51.583,50.313 J7.10@51.583,53.437
  Bottom Layer w0.4: v1(51.562,50.292) 51.562,70.866 v1(54.737,74.041)
P720: J7.12 J7_.17 | length 25.5
  Top Layer w0.4: v1(50.292,51.435) 50.313,51.456 J7.12@50.313,53.437
  Bottom Layer w0.4: v1(50.292,51.435) 50.292,72.39 v1(52.07,74.168)
P721: J7.14 J7_.15 | length 27.2
  Top Layer w0.4: v1(49.149,50.292) 49.17,50.313 J7.14@49.17,53.437
  Bottom Layer w0.4: v1(49.149,50.292) 49.149,73.787 v1(49.53,74.168)
P722: J7.16 J7_.13 | length 24.9
  Top Layer w0.4: v1(47.879,51.435) 47.9,51.456 J7.16@47.9,53.437
  Bottom Layer w0.4: v1(46.99,73.914) 47.879,73.025 v1(47.879,51.435)
P723: J7.18 J7_.11 | length 27.8
  Top Layer w0.4: v1(46.482,50.292) 46.503,50.313 J7.18@46.503,53.437
  Bottom Layer w0.4: v1(44.577,74.168) 46.482,72.263 v1(46.482,50.292)
P724: J7.20 J7_.9 | length 25.8
  Top Layer w0.4: v1(45.212,51.435) 45.233,51.456 J7.20@45.233,53.437
  Bottom Layer w0.4: v1(42.037,73.914) 45.212,70.739 v1(45.212,51.435)
P725: J7.22 J7_.7 | length 29.2
  Top Layer w0.4: v1(44.069,50.292) 44.09,50.313 J7.22@44.09,53.437
  Bottom Layer w0.4: v1(39.243,74.295) 44.069,69.469 v1(44.069,50.292)
P726: J7.24 J7_.5 | length 26.9
  Top Layer w0.4: v1(42.799,51.435) 42.82,51.456 J7.24@42.82,53.437
  Bottom Layer w0.4: v1(36.957,73.914) 42.799,68.072 v1(42.799,51.435)
P727: J7.26 J7_.3 | length 29.9
  Top Layer w0.4: v1(41.402,50.292) 41.423,50.313 41.423,53.437 J7.26
  Bottom Layer w0.4: v1(34.29,74.041) 41.402,66.929 v1(41.402,50.292)
P728: J7.28 J7_.1 | length 28.1
  Top Layer w0.4: v1(40.132,51.435) 40.153,51.456 40.153,53.437 J7.28
  Bottom Layer w0.4: v1(31.75,74.041) 40.132,65.659 v1(40.132,51.435)
copper on no net: | length 7.4
  Top Layer w0.4: 81.471,67.084 81.361,66.975 80.899,67.437 80.899,67.945 81.407,68.453 81.534,68.58 81.534,69.431 81.768,69.665 82.1,69.665 82.423,69.342 82.423,69.215 82.423,68.453 82.677,68.199 82.697,68.199 82.931,67.965 82.931,67.564 82.931,67.544 82.716,67.33 82.276,67.33 82.042,67.564 81.915,67.564

## Silkscreen, mask and mechanical layers (free items; w line width, h text height)
Top Overlay:
  drawing of 40 lines, arcs and shapes, not listed
  text "ETR Carrier I 2023" at 74.424,6.35 h2.5
  text "HW * (Bernat + Guillem)" at 74.551,4.135 h2.5
Mechanical 1:
  lines w0.254: 0.127,5.127 0.127,75.127 cw(c5.127,75.127) 5.127,80.127 95.127,80.127 cw(c95.127,75.127) 100.127,75.127 100.127,5.127 cw(c95.127,5.127) 95.127,0.127 5.127,0.127

## Text inside footprints (layer, text, board x,y; h text height)
J4_: Top Overlay "28" at 31.429,49.528 h2 r90; Top Overlay "27" at 36.429,49.528 h2 r90; Top Overlay "2" at 31.429,30.788 h2 r90; Top Overlay "1" at 36.429,30.988 h2 r90
J4_: Top Overlay "1" at 12.895,57.244 h2 r270; Top Overlay "2" at 7.645,57.594 h2 r270; Top Overlay "27" at 12.895,19.814 h2 r270; Top Overlay "28" at 7.645,19.814 h2 r270
J5: Top Overlay "28" at 39.409,21.508 h2 r180; Top Overlay "27" at 39.409,26.508 h2 r180; Top Overlay "2" at 58.149,21.508 h2 r180; Top Overlay "1" at 57.949,26.508 h2 r180
J5_: Top Overlay "1" at 29.878,10.863 h2; Top Overlay "2" at 29.528,5.613 h2; Top Overlay "27" at 67.308,10.863 h2; Top Overlay "28" at 67.308,5.613 h2
J6: Top Overlay "28" at 61.429,49.528 h2 r90; Top Overlay "27" at 66.429,49.528 h2 r90; Top Overlay "2" at 61.429,30.788 h2 r90; Top Overlay "1" at 66.429,30.988 h2 r90
J6_: Top Overlay "1" at 89.035,61.689 h2 r270; Top Overlay "2" at 83.785,62.039 h2 r270; Top Overlay "27" at 89.035,24.259 h2 r270; Top Overlay "28" at 83.785,24.259 h2 r270
J7: Top Overlay "28" at 39.409,53.508 h2 r180; Top Overlay "27" at 39.409,58.508 h2 r180; Top Overlay "2" at 58.149,53.508 h2 r180; Top Overlay "1" at 57.949,58.508 h2 r180
J7_: Top Overlay "1" at 29.37,73.661 h2; Top Overlay "2" at 29.02,68.411 h2; Top Overlay "27" at 66.8,73.661 h2; Top Overlay "28" at 66.8,68.411 h2